# Altium PCB amplifier.PcbDoc
Units mil, origin at the board's own origin, x right, y up, seen from the top; angles counter-clockwise.
Board outline 6000 x 4000 mil, 2 copper layers (Top Layer, Bottom Layer); 17 components, 16 nets, 57 pads, 0 vias.
Unrouted connection lines stored in the file: 35.
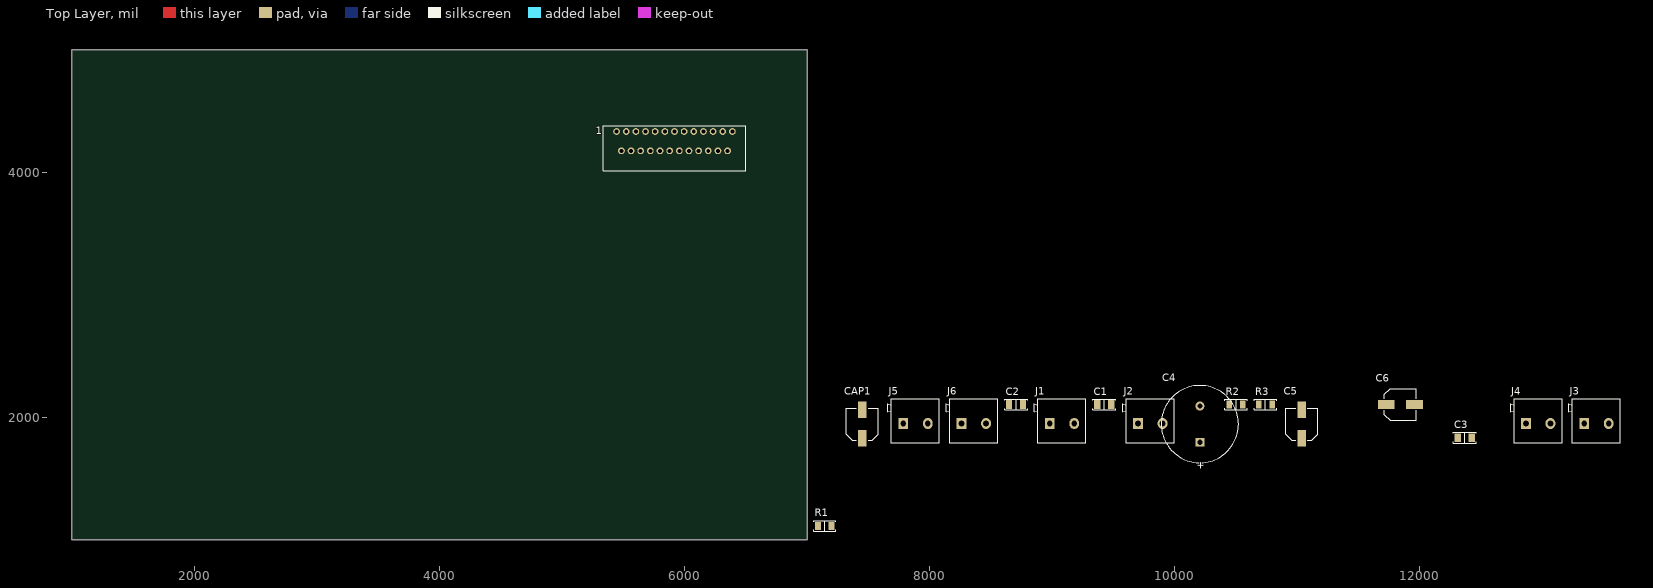
[diagram p0: Top Layer view]
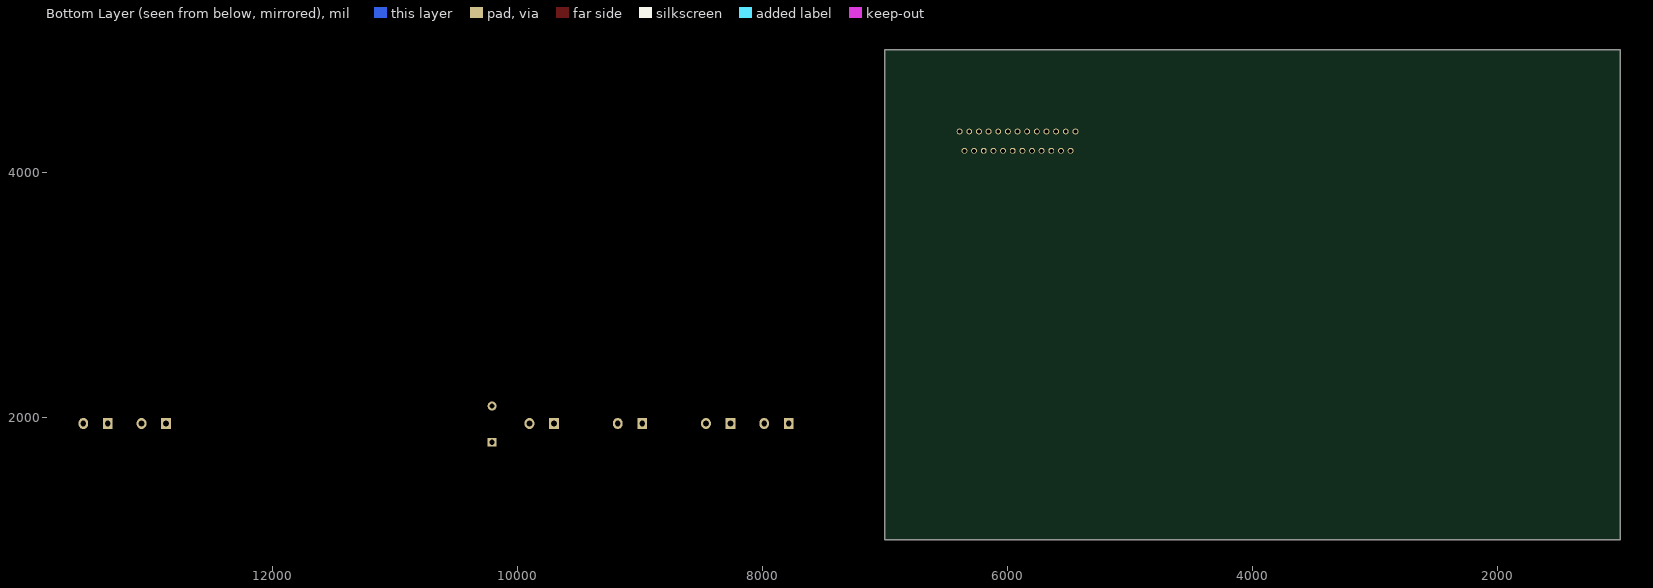
[diagram p1: Bottom Layer view, seen from below]

## Layer stack, top to bottom
Top Solder: solder mask 0.4, Solder Resist, Dk 3.5
Top Layer: signal copper 1.4
Dielectric 1: dielectric 12.6, FR-4, Dk 4.8
Bottom Layer: signal copper 1.4
Bottom Solder: solder mask 0.4, Solder Resist, Dk 3.5

## Board outline
1000,1000 7000,1000 7000,5000 1000,5000

## Design rules (kind name [scope] priority, off if disabled: settings)
Clearance [All] p1: gap=10 ignorepadtopadclearanceinfootprint=FALSE except(0: Arc-Hole Track-Hole SMDPad-Hole THPad-Hole Via-Hole Fill-Hole Poly-Hole Region-Hole Text-Hole)
PolygonConnect [All] p1: connectstyle=Relief reliefconductorwidth=10 reliefentries=4 polygonreliefangle="90 Angle" airgapwidth=10
RoomDefinition amplifier [InComponentClass('amplifier')] p1: confinementstyle=ConfineIn formatcopy=TRUE lockcomponents=FALSE outline 7045,1060 13645,1060 13645,2260 7045,2260
RoutingVias [All] p1: holewidth=28 width=50 viastyle="Through Hole" minholewidth=28 minwidth=50 maxholewidth=28 maxwidth=50
SolderMaskExpansion [All] p1: expansion=4
Width [All] p1: maxlimit=10 minlimit=10 preferedwidth=10
30 further rules are at their usual default settings.

## Components (designator, comment, footprint, x,y, rotation, side; value= is the part's Value field where it differs from the comment)
1 "TDA7850" FLEXIWATT25 5918.11,4332.48 r180 top
C1 "220Nf" "CAP 1206/3216" 9425,2105 r0 top value=0.1uF
C2 "220Nf" "CAP 1206/3216" 8705,2105 r0 top value=0.1uF
C3 "100NF" "CAP 1206/3216" 12365,1835 r0 top value=0.1uF
C4 "2000uF-16V" Cap_5_(7.5mm) 10205,1945 r90 top value=10uF
C5 "1UF" "CAP ALUM 6.6MM" 11035,1945 r90 top value=10uF
C6 "1UF" "CAP ALUM 6.6MM" 11840,2105 r0 top value=10uF
CAP1 "1UF" "CAP ALUM 6.6MM" 7450,1945 r90 top value=10uF
J1 "2 Pin" Socket_Blue_2 9080,1950 r0 top
J2 "2 Pin" Socket_Blue_2 9800,1950 r0 top
J3 "2 Pin" Socket_Blue_2 13440,1950 r0 top
J4 "2 Pin" Socket_Blue_2 12965,1950 r0 top
J5 "2 Pin" Socket_Blue_2 7885,1950 r0 top
J6 "2 Pin" Socket_Blue_2 8360,1950 r0 top
R1 "10K" "RES 1206/3216" 7145,1115 r0 top value=1K
R2 "10K" "RES 1206/3216" 10500,2105 r0 top value=1K
R3 "47K" "RES 1206/3216" 10740,2105 r0 top value=1K

## Footprints (in the part's own frame and the unit in brackets; to place one, negate y for a bottom-side part, rotate by r counter-clockwise, add the part's x,y. Pads: shape width x height; smd on the part's side, far side on the other; paste and mask are expansions set on the pad)
"CAP 1206/3216" [mm] "Chip Capacitor, 2-Leads, Body 3.25x1.60mm, IPC Medium Density"
  rect 1.3x1.8 smd: 1(-1.45,0) 2(1.45,0)
  silkscreen extent -2.37,-1.12 2.37,1.12, body extent -1.6,-0.81 1.6,0.81, height 1.62
"CAP ALUM 6.6MM" [mm] "Aluminum Electrolytic Capacitor, Body 6.60x6.60x7.70mm, IPC Low Density"
  rect 3.45x1.8 smd: 1(-2.95,0) 2(2.95,0)
  silkscreen extent -3.3,-3.3 3.3,3.3, body extent -3.5,-3.3 3.5,3.3, height 7.7
Cap_5_(7.5mm) [mm] "Capacitor, Electrolytic, Radial; Body 16 x 25 mm (Dia.xH typ); Pin Spacing 7.5 mm (typ)"
  rect 1.85x1.85 hole 1.1: 1(-3.75,0)
  round 1.85 hole 1.1: 2(3.75,0)
  silkscreen extent -8,-8 8,8, body extent -8,-8 8,8, height 41
FLEXIWATT25 [mm]
  round 1.4 / inner round 1.524 / far side round 1.219 hole 0.813: P$1(-12,0) P$2(-11,4) P$3(-10,0) P$4(-9,4) P$5(-8,0) P$6(-7,4) P$7(-6,0) P$8(-5,4) P$9(-4,0) P$10(-3,4) P$11(-2,0) P$12(-1,4) P$13(0,0) P$14(1,4) P$15(2,0) P$16(3,4) P$17(4,0) P$18(5,4) P$19(6,0) P$20(7,4) P$21(8,0) P$22(9,4) P$23(10,0) P$24(11,4) P$25(12,0)
  silkscreen extent -14.73,-1.14 14.73,8.13, body extent -14.6,-0.16 14.63,8.03, height 19.7
"RES 1206/3216" [mm] "Chip Resistor, 2-Leads, Body 3.13x1.55mm, IPC Medium Density"
  rect 1.2x1.65 smd: 1(-1.4,0) 2(1.4,0)
  silkscreen extent -2.3,-1.1 2.3,1.1, body extent -1.57,-0.8 1.62,0.8, height 0.6
Socket_Blue_2 [mil]
  rect 80x90 hole 46: 1(-100,0)
  oval 80x90 hole 46: 2(100,0)
  silkscreen extent -225,-160 195,200, body extent -227,-157 195,200, height 493

## Part data
1: Package=FLEXIWATT25, DeviceSetName=TDA7386, GateName_1=G$1, LibraryName=Audio-Power-amlifier, SymbolName_1=TDA7386
C1 C2 C3: library part Capacitor, "SMT Capacitor"
C4 C5 C6 CAP1: library part "Polarised Capacitor", "SMT Polarised Capacitor"
R1 R2 R3: library part Resistor, "SMT Resistor"

## Nets (pads, with @x,y where several pads share a name; then routed paths per layer and width w, separated by ;. In a path a pad name is that pad's centre, name@x,y a point inside that pad or via, vN(x,y) a via of type N, cw(c..) or ccw(c..) an arc to the next point about the centre after c; other vN are vias at no path point)
GND: 1.P$1 1.P$2 1.P$8 1.P$13 1.P$16 1.P$18 1.P$24 C3.1 C4.2 C5.2 C6.2 CAP1.2 J2.2 R1.2
Net1_P$3: 1.P$3 J4.1
Net1_P$4: 1.P$4 C5.1 R2.2
Net1_P$5: 1.P$5 J4.2
Net1_P$7: 1.P$7 J3.1
Net1_P$9: 1.P$9 J3.2
Net1_P$10: 1.P$10 CAP1.1
Net1_P$17: 1.P$17 J5.2
Net1_P$19: 1.P$19 J5.1
Net1_P$21: 1.P$21 J6.2
Net1_P$22: 1.P$22 C6.1 R3.2
Net1_P$23: 1.P$23 J6.1
Net1_P$25: 1.P$25 R1.1
NetC1_1: C1.1 J1.1
NetC2_1: C2.1 J1.2
VCC: 1.P$6 1.P$20 C3.2 C4.1 J2.1 R2.1 R3.1
pads on no net: 1.P$11 1.P$12 1.P$14 1.P$15 C1.2 C2.2

## Text inside footprints (layer, text, board x,y; h text height)
C4: Top Overlay "+" at 10234.53,1571.97 h59.06 r90